# Altium PCB LEDCube.PcbDoc
Units mil, origin at the board's own origin, x right, y up, seen from the top; angles counter-clockwise.
Board outline 6000 x 4000 mil, 2 copper layers (Top Layer, Bottom Layer); 19 components, 27 nets, 62 pads, 0 vias.
Unrouted connection lines stored in the file: 35.
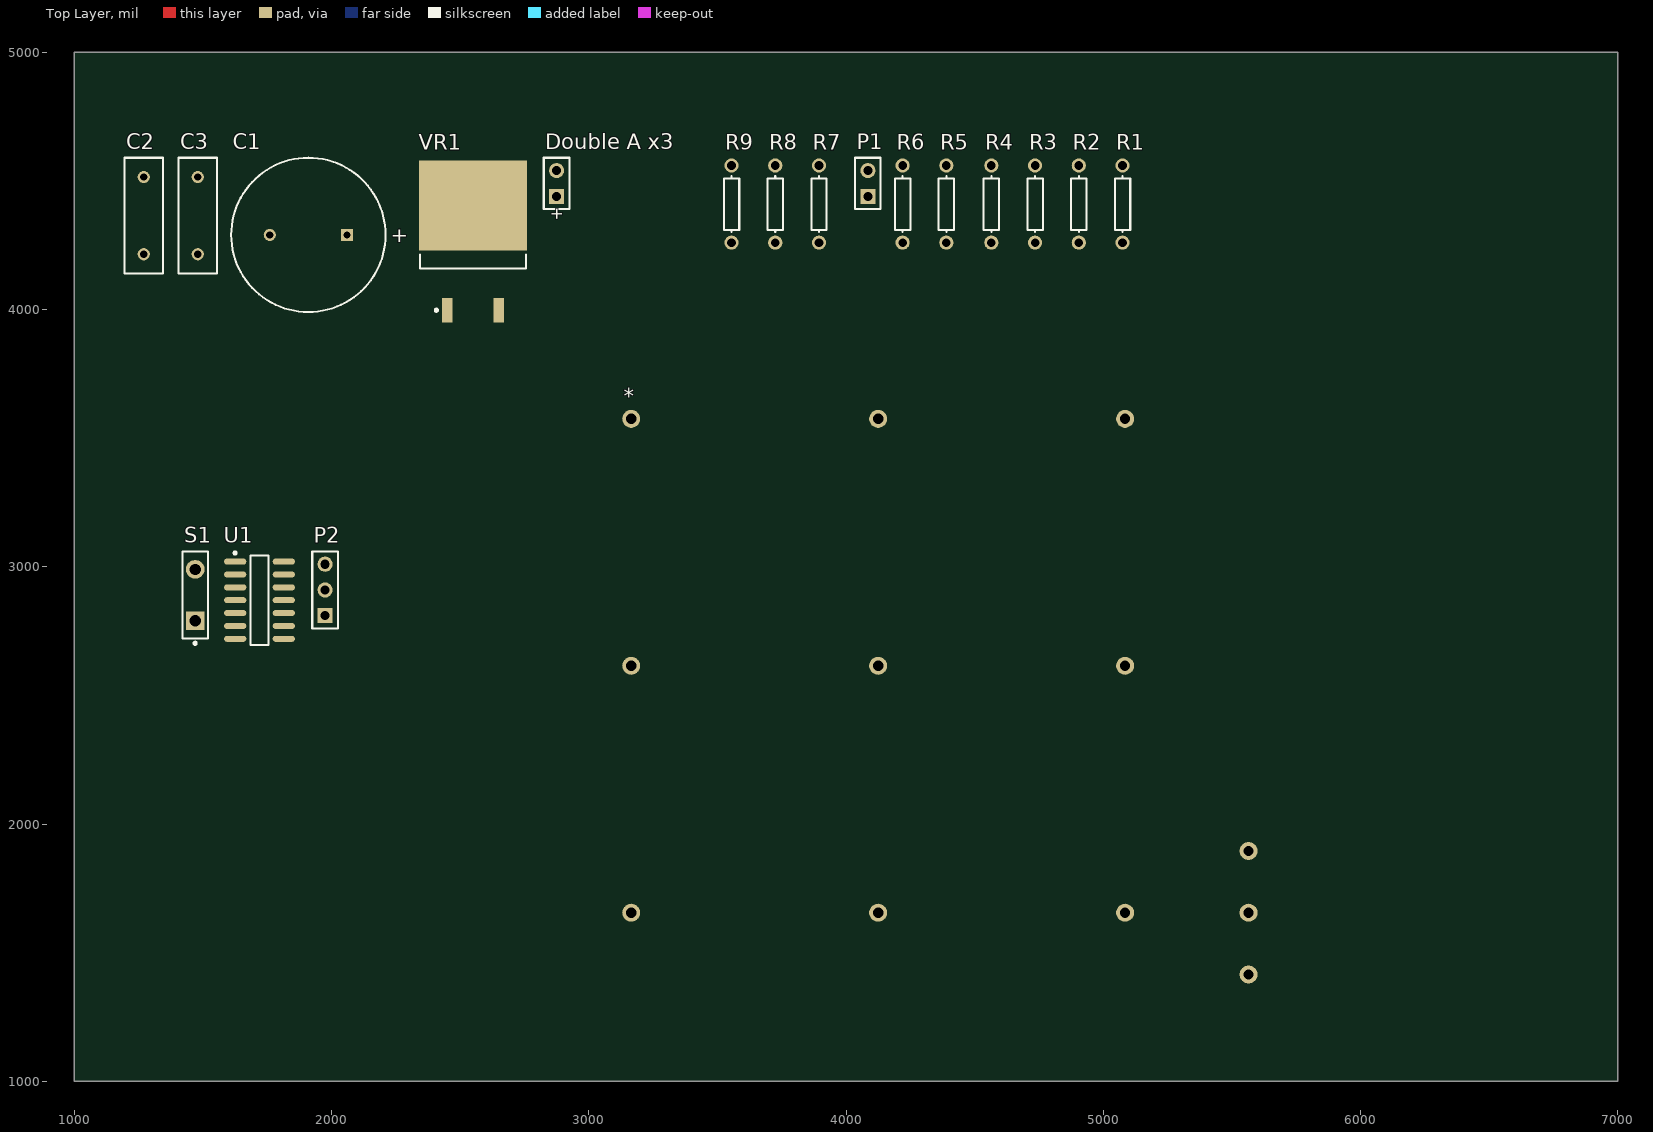
[diagram p0: Top Layer view]
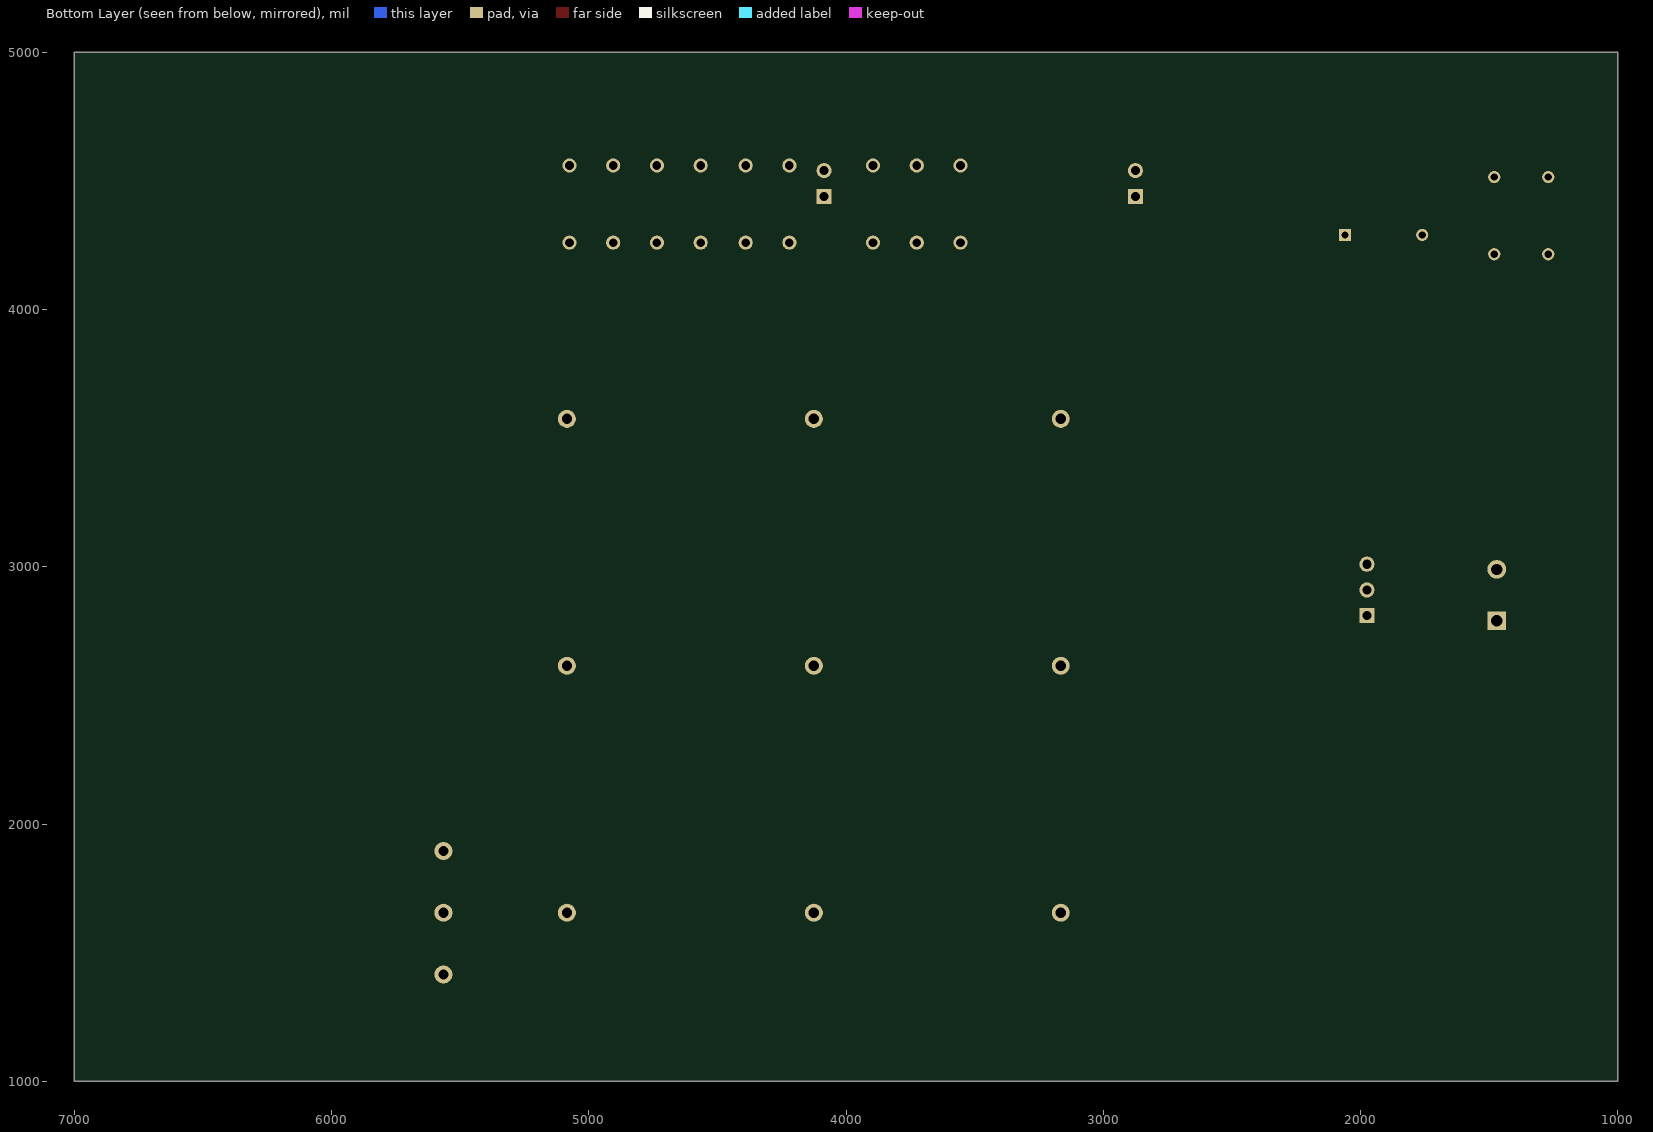
[diagram p1: Bottom Layer view, seen from below]

## Layer stack, top to bottom
Top Solder: solder mask 0.4, Solder Resist, Dk 3.5
Top Layer: signal copper 1.4
Dielectric 1: dielectric 12.6, FR-4, Dk 4.8
Bottom Layer: signal copper 1.4
Bottom Solder: solder mask 0.4, Solder Resist, Dk 3.5

## Board outline
1000,1000 7000,1000 7000,5000 1000,5000

## Design rules (kind name [scope] priority, off if disabled: settings)
Clearance [All] p1: gap=10
PolygonConnect [All] p1: connectstyle=Relief reliefconductorwidth=10 reliefentries=4 polygonreliefangle="90 Angle" airgapwidth=10
RoutingVias [All] p1: holewidth=28 width=50 viastyle="Through Hole" minholewidth=28 minwidth=50 maxholewidth=28 maxwidth=50
SolderMaskExpansion [All] p1: expansion=4
Width [All] p1: maxlimit=10 minlimit=10 preferedwidth=10
30 further rules are at their usual default settings.

## Components (designator, comment, footprint, x,y, rotation, side; value= is the part's Value field where it differs from the comment)
* "LED FP" "Cube Column FP" 3165,1655 r0 top
C1 "Cap Pol1" RB7.6-15 1910,4290 r0 top
C2 "Cap" RAD-0.3 1270,4365 r90 top
C3 "Cap" RAD-0.3 1480,4365 r90 top
"Double A x3" "Battery" BAT-2 2875,4490 r90 top
P1 "Header 2" HDR1X2 4085,4440 r90 top
P2 "Header 3" HDR1X3 1975,2810 r90 top
R1 "Res1" AXIAL-0.3 5075,4410 r90 top
R2 "Res1" AXIAL-0.3 4905,4410 r90 top
R3 "Res1" AXIAL-0.3 4735,4410 r90 top
R4 "Res1" AXIAL-0.3 4565,4410 r90 top
R5 "Res1" AXIAL-0.3 4390,4410 r90 top
R6 "Res1" AXIAL-0.3 4220,4410 r90 top
R7 "Res1" AXIAL-0.3 3895,4410 r90 top
R8 "Res1" AXIAL-0.3 3725,4410 r90 top
R9 "Res1" AXIAL-0.3 3555,4410 r90 top
S1 "SW-SPST" SPST-2 1470,2890 r90 top
U1 "ATtiny44-20SSU" 14S1_N 1720,2870 r0 top
VR1 "Volt Reg" D2PAK_N 2550,4265 r90 top

## Footprints (in the part's own frame and the unit in brackets; to place one, negate y for a bottom-side part, rotate by r counter-clockwise, add the part's x,y. Pads: shape width x height; smd on the part's side, far side on the other; paste and mask are expansions set on the pad)
14S1_N [mm] "SOIC, 14-Leads, Body 8.7x3.9mm, Pitch 1.27mm, IPC Medium Density"
  oval 2.2x0.6 smd: 1(-2.4,3.81) 2(-2.4,2.54) 3(-2.4,1.27) 4(-2.4,0) 5(-2.4,-1.27) 6(-2.4,-2.54) 7(-2.4,-3.81) 8(2.4,-3.81) 9(2.4,-2.54) 10(2.4,-1.27) 11(2.4,0) 12(2.4,1.27) 13(2.4,2.54) 14(2.4,3.81)
  silkscreen extent -2.52,-4.4 0.9,4.78, body extent -2,-4.38 2,4.38, height 1.75
AXIAL-0.3 [mm] "Axial Device, Thru-Hole; 2 Leads; 0.3 in Pin Spacing"
  round 1.4 hole 0.85: 1(-3.81,0) 2(3.81,0)
  silkscreen extent -2.77,-0.76 2.77,0.76
BAT-2 [mm] "Battery; 2 Leads"
  rect 1.5x1.5 hole 0.9: 1(-1.27,0)
  round 1.5 hole 0.9: 2(1.27,0)
  silkscreen extent -2.54,-1.27 2.54,1.27
"Cube Column FP" [mil]
  round 70 hole 40: 0(0,1920) 1(960,1920) 2(1920,1920) 3(0,960) 4(960,960) 5(1920,960) 6(0,0) 7(960,0) 8(1920,0) 9(2400,-240) 10(2400,0) 11(2400,240)
D2PAK_N [mm] "D2-PAK, 4-Leads, Body 8.8x10.4mm, Pitch 2.54mm, Lead Span 15.1mm, IPC Medium Density"
  rect 2.4x1.05 smd: 1(-6.8,2.54) 3(-6.8,-2.54)
  rect 8.9x10.65 smd: 2(3.55,0)
  silkscreen extent -6.92,-5.25 -1.3,5.25, body extent -2.7,-5.28 6.3,5.28, height 4.69
HDR1X2 [mm] "Connector; Header; 2 Position"
  rect 1.5x1.5 hole 0.9: 1(0,0)
  round 1.5 hole 0.9: 2(2.54,0)
  silkscreen extent -1.27,-1.27 3.81,1.27
HDR1X3 [mm] "Connector; Header; 3 Position"
  rect 1.5x1.5 hole 0.9: 1(0,0)
  round 1.5 hole 0.9: 2(2.54,0) 3(5.08,0)
  silkscreen extent -1.27,-1.27 6.35,1.27
RAD-0.3 [mm] "Radial Cap, Thru-Hole; 2 Leads; 0.3 in Pin Spacing"
  round 1.2 hole 0.7: 1(-3.81,0) 2(3.81,0)
  silkscreen extent -5.71,-1.91 5.71,1.91
RB7.6-15 [mm] "Polarized Capacitor (Radial); 2 Leads"
  rect 1.2x1.2 hole 0.7: 1(3.81,0)
  round 1.2 hole 0.7: 2(-3.81,0)
  silkscreen extent -7.62,-7.62 7.62,7.62
SPST-2 [mm] "Switch; 2 Leads"
  rect 1.85x1.85 hole 1.1: 1(-2.54,0)
  round 1.85 hole 1.1: 2(2.54,0)
  silkscreen extent -4.89,-1.27 4.28,1.27

## Part data
C1: "Polarized Capacitor (Radial)"
C2 C3: "Capacitor"
"Double A x3": "Multicell Battery"
P1: "Header, 2-Pin"
P2: "Header, 3-Pin"
R1 R2 R3 R4 R5 R6 R7 R8 R9: "Resistor"
S1: "Single-Pole, Single-Throw Switch"
U1: "8-bit AVR Microcontroller, 2.7-5.5V, 4KB Flash, 256 Bytes EEPROM, 256 Bytes SRAM, 14-pin SOIC, Industrial Grade (-40°C to 85°C), Pb-Free"
VR1: "Voltage Regulator"

## Nets (pads, with @x,y where several pads share a name; then routed paths per layer and width w, separated by ;. In a path a pad name is that pad's centre, name@x,y a point inside that pad or via, vN(x,y) a via of type N, cw(c..) or ccw(c..) an arc to the next point about the centre after c; other vN are vias at no path point)
GND: "Double A x3.2" C1.2 C2.1 C3.1 P1.1 U1.14 VR1.2
Net*_0: *.0 R1.2
Net*_1: *.1 R2.2
Net*_2: *.2 R3.2
Net*_3: *.3 R4.2
Net*_4: *.4 R5.2
Net*_5: *.5 R6.2
Net*_6: *.6 R7.2
Net*_7: *.7 R8.2
Net*_8: *.8 R9.2
Net*_9: *.9 U1.3
Net*_10: *.10 U1.5
Net*_11: *.11 U1.4
NetP2_2: P2.2 S1.1
NetR1_1: R1.1 U1.13
NetR2_1: R2.1 U1.12
NetR3_1: R3.1 U1.11
NetR4_1: R4.1 U1.10
NetR5_1: R5.1 U1.9
NetR6_1: R6.1 U1.8
NetR7_1: R7.1 U1.7
NetR8_1: R8.1 U1.6
NetR9_1: R9.1 U1.2
NetS1_2: S1.2 U1.1
V_BATT: C1.1 C3.2 P2.1 VR1.3
V_EXT: P1.2 P2.3
VCC: "Double A x3.1" C2.2 VR1.1

## Text inside footprints (layer, text, board x,y; h text height)
C1: Top Overlay "+" at 2230.15,4260.99 h59.06
"Double A x3": Top Overlay "+" at 2897.72,4345.51 h45.28 r90